# EAGLE board xambi_1.0 (EAGLE 6.5.0)
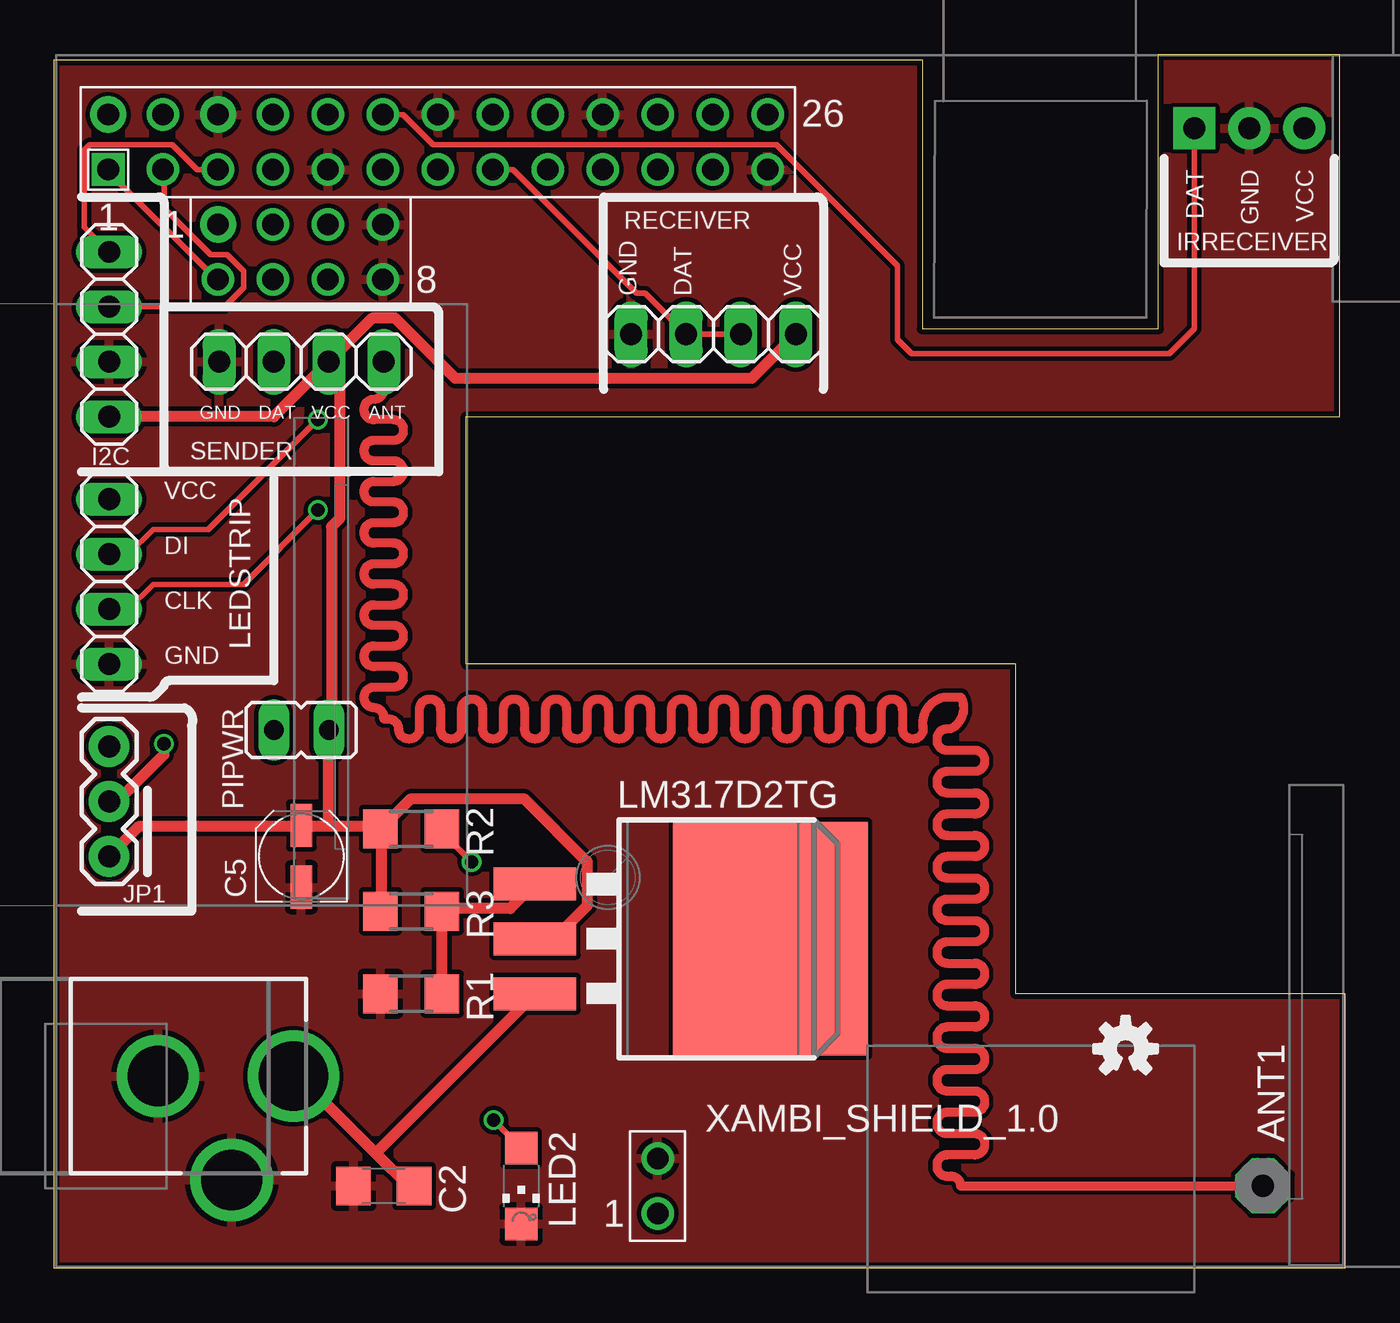
[diagram p0: board, top side]
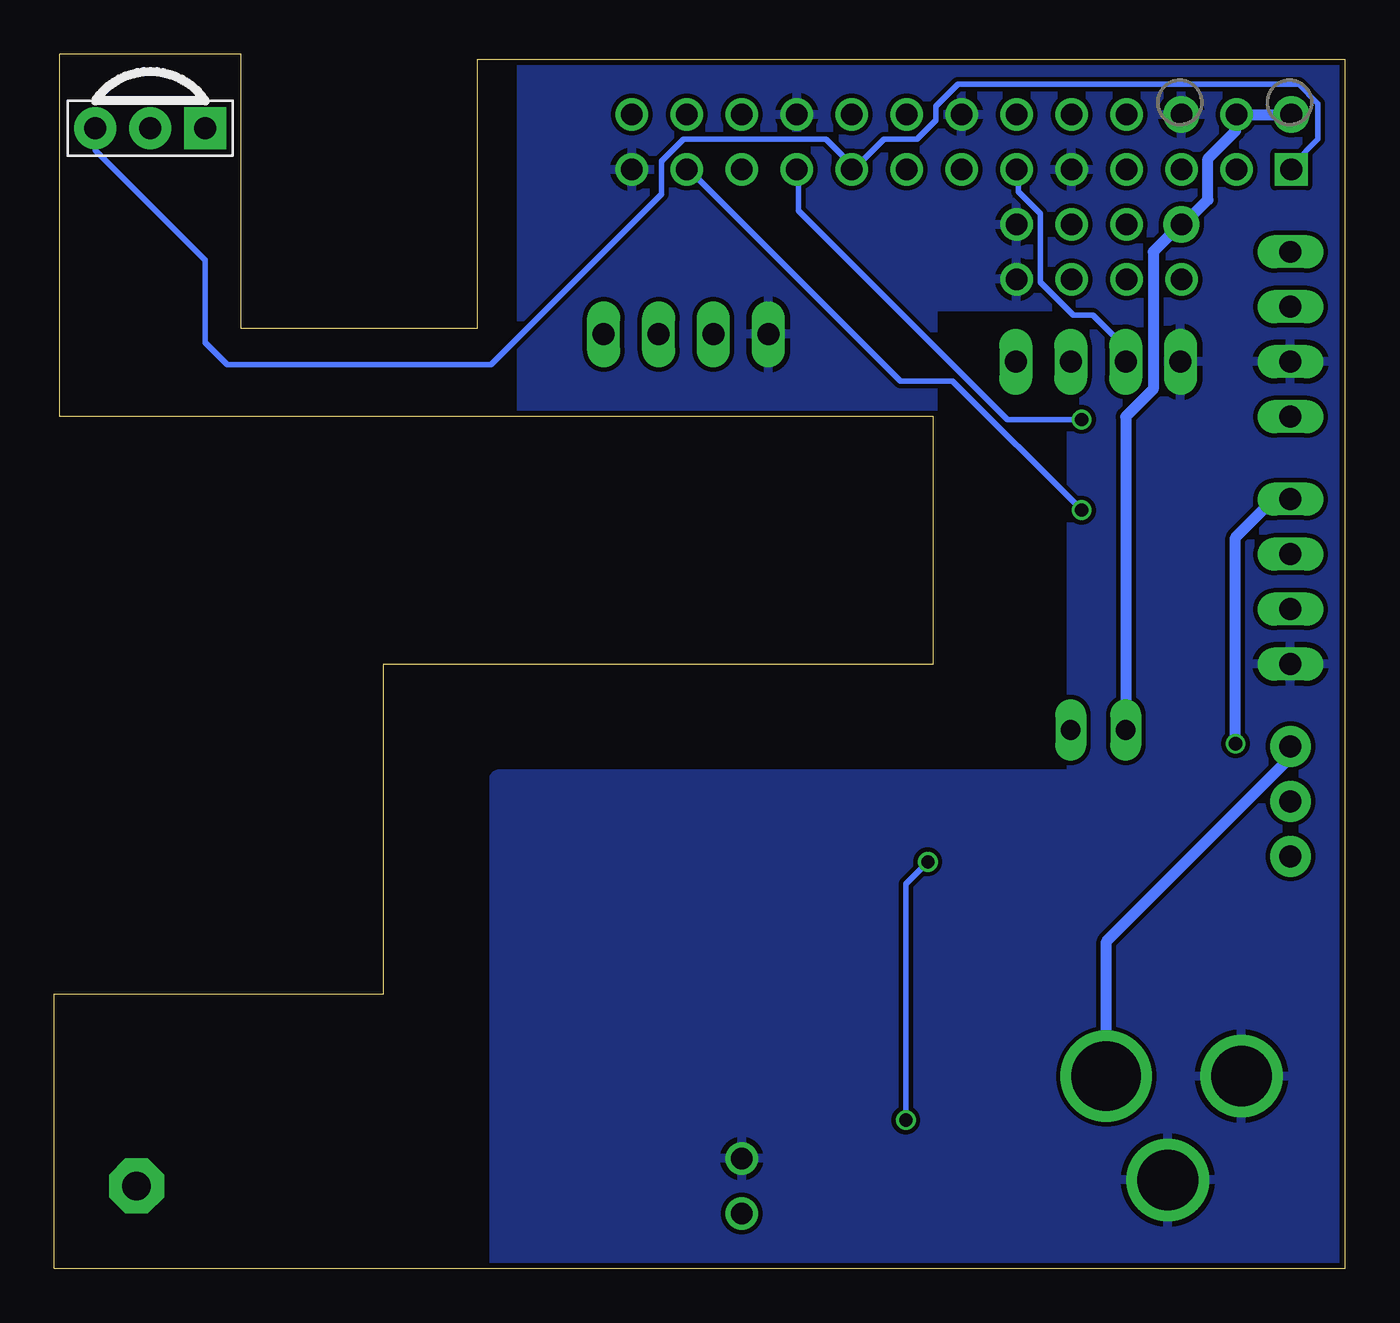
[diagram p1: board, bottom side, seen from below]

Size 59.69 x 56.13 mm. Coordinates in mm from the lower left corner, seen from the top.
Outline: 0,0 0,55.88 40.13,55.88 40.13,43.43 51.05,43.43 51.05,56.13 59.44,56.13 59.44,39.37 19.05,39.37 19.05,27.94 44.45,27.94 44.45,12.7 59.69,12.7 59.69,0 0,0
Copper layers (1*16): Top 0.035mm / dielectric 1.5mm / Bottom 0.035mm
Design rules "ITEADstudio_DRC": minimum track width 6mil, minimum drill 12mil, track to track 6mil, track to pad 6mil, pad to pad 6mil, via to via 6mil, smd to smd 0mil, copper to edge 10mil, drill to drill 10mil, minimum pad ring 10mil, minimum via ring 6mil, stop-mask expansion 2mil, vias tented up to drill 100mil, thermal gap 10mil
Net classes: 0 default: width 0.203 mm, drill 0.254 mm, clearance 0.152 mm; 1 power: width 0.508 mm, drill 0.305 mm, clearance 0.203 mm

## Footprints (pad centres in the part's own frame; a part is rotated, then mirrored left to right if it is on the bottom)
PAD-01 = drill 1.321 pad 2.54 octagon: 1 0,0
C1206 = smd 1.6 x 1.8: 1 -1.4,0; 2 1.4,0
UD-4X5,8_NICHICON = smd 2 x 1: + 1.425,0; - -1.425,0
DCJACK_2MM_PTH = drill 2.8: GND 0,7.35; GNDBREAK 4.8,10.75 | drill 3.2: PWR 0,13.6
1X04 = drill 1.016 long: 1 -3.81,0; 2 -1.27,0; 3 1.27,0; 4 3.81,0
PNA460XM = drill 1.016 pad 1.93 square: 1 -2.54,0 | drill 1.016 pad 1.93: 2 0,0; 3 2.54,0
1X03 = drill 1.016 pad 1.88: 1 0,0; 2 2.54,0; 3 5.08,0
CHIPLED_1206 = smd 1.5 x 1.5: A 0,-1.75; C 0,1.75
TO263 = smd 1.524 x 3.81: 1 -2.54,-8.255; 2 0,-8.255; 3 2.54,-8.255 | smd 10.8 x 9: 4 0,2.635
JP1 = drill 0.914 long: 1 0,-1.27; 2 0,1.27
R1206 = smd 1.6 x 1.803: 1 -1.422,0; 2 1.422,0
RPI-B-V2 = drill 1 square: P1_1 0,0 | drill 1 pad 1.676: P1_2 0,2.54; P1_6 5.08,2.54; P5_1 5.08,-2.54 | drill 1: P1_3 2.54,0; P1_4 2.54,2.54; P1_5 5.08,0; P1_7 7.62,0; P1_8 7.62,2.54; P1_9 10.16,0; P1_10 10.16,2.54; P1_11 12.7,0; P1_12 12.7,2.54; P1_13 15.24,0; P1_14 15.24,2.54; P1_15 17.78,0; P1_16 17.78,2.54; P1_17 20.32,0; P1_18 20.32,2.54; P1_19 22.86,0; P1_20 22.86,2.54; P1_21 25.4,0; P1_22 25.4,2.54; P1_23 27.94,0; P1_24 27.94,2.54; P1_25 30.48,0; P1_26 30.48,2.54; P5_2 5.08,-5.08; P5_3 7.62,-2.54; P5_4 7.62,-5.08; P5_5 10.16,-2.54; P5_6 10.16,-5.08; P5_7 12.7,-2.54; P5_8 12.7,-5.08; P6_1 25.4,-48.26; P6_2 25.4,-45.72

## Placement (x,y rotation side)
ANT1  433MHz  [PAD-01]  55.88,3.81 0 top
C2  100n  [C1206]  15.24,3.81 180 top
C5  1µF  [UD-4X5,8_NICHICON]  11.43,19.05 90 top
CN1  12-32V  [DCJACK_2MM_PTH]  -2.54,8.89 270 top
I2C  [1X04]  2.54,43.18 270 top
IRRECEIVER  PNA460XM  [PNA460XM]  55.24,52.7 180 bottom
JP1  5V [LED] 12V  [1X03]  2.54,19.05 90 top
LED2  red  [CHIPLED_1206]  21.59,3.81 180 top
LEDSTRIP  [1X04]  2.54,31.75 270 top
LM317D2TG  [TO263]  30.48,15.24 270 top
LOGO1  OSHW-LOGOS  [OSHW-LOGO-S]  49.53,10.16 0 top
PIPWR  [JP1]  11.43,24.89 270 top
R1  100R  [R1206]  16.51,12.7 0 top
R2  680  [R1206]  16.51,20.32 180 top
R3  33  [R1206]  16.51,16.51 180 top
RECEIVER  [1X04]  30.48,43.18 0 top
SENDER  [1X04]  11.43,41.91 180 top
U$2  REVISION  [REVISION]  -13.97,-10.16 0 top  (outside the outline)
XAMBI_SHIELD_1.0  XPIX Dev. / 2014  [RPI-B-V2]  2.5,50.8 0 top

## Library data of the parts
ANT1 = discrete
C2 C5 R1-R3 = rcl
CN1 IRRECEIVER LED2 = _adafruit
I2C LEDSTRIP RECEIVER SENDER = pinhead
JP1 = SparkFun-Connectors
LM317D2TG = v-reg
LOGO1 U$2 = SparkFun-Aesthetics
PIPWR = jumper
XAMBI_SHIELD_1.0 = raspberry

## Nets
+3V3: IRRECEIVER.3 XAMBI_SHIELD_1.0.P1_1 XAMBI_SHIELD_1.0.P1_17 XAMBI_SHIELD_1.0.P5_2
+5V [power]: C5.+ I2C.4 JP1.1 LM317D2TG.2 PIPWR.2 R2.2 R3.2 RECEIVER.4 SENDER.2
+12V [power]: C2.1 CN1.PWR JP1.3 LM317D2TG.3
CLK: LEDSTRIP.3 XAMBI_SHIELD_1.0.P1_23
DI: LEDSTRIP.2 XAMBI_SHIELD_1.0.P1_19
GND [power]: C2.2 C5.- CN1.GND CN1.GNDBREAK I2C.3 IRRECEIVER.2 LED2.C LEDSTRIP.4 R1.1 RECEIVER.1 SENDER.4 XAMBI_SHIELD_1.0.P1_6 XAMBI_SHIELD_1.0.P1_9 XAMBI_SHIELD_1.0.P1_14 XAMBI_SHIELD_1.0.P1_20 XAMBI_SHIELD_1.0.P1_25 XAMBI_SHIELD_1.0.P5_7 XAMBI_SHIELD_1.0.P5_8 XAMBI_SHIELD_1.0.P6_2
GPIO30: XAMBI_SHIELD_1.0.P5_5
GPIO31: XAMBI_SHIELD_1.0.P5_6
I2C0_SCL/GPIO29: XAMBI_SHIELD_1.0.P5_4
I2C0_SDA/GPIO28: XAMBI_SHIELD_1.0.P5_3
IRINPUT: IRRECEIVER.1 XAMBI_SHIELD_1.0.P1_12
N$1: I2C.2 XAMBI_SHIELD_1.0.P1_3
N$3 [power]: PIPWR.1 XAMBI_SHIELD_1.0.P1_2 XAMBI_SHIELD_1.0.P1_4 XAMBI_SHIELD_1.0.P5_1
N$4: ANT1.1 SENDER.1
N$5 [power]: JP1.2 LEDSTRIP.1
N$6: I2C.1 XAMBI_SHIELD_1.0.P1_5
N$7: LED2.A R2.1
N$8 [power]: LM317D2TG.1 R1.2 R3.1
RESET: XAMBI_SHIELD_1.0.P6_1
RFINPUT: RECEIVER.2 RECEIVER.3 XAMBI_SHIELD_1.0.P1_15
RFOUTPUT: SENDER.3 XAMBI_SHIELD_1.0.P1_11

## Tracks (layer width: path | path; a pad name or v marks a point on that pad's centre or on a via)
+3V3
  Top 0.254: 22.86,50.8 XAMBI_SHIELD_1.0.P1_17 | 7.62,45.72 XAMBI_SHIELD_1.0.P5_2 7.49,45.72 2.41,50.8 XAMBI_SHIELD_1.0.P1_1 2.54,50.8
  Bottom 0.254: XAMBI_SHIELD_1.0.P1_1 2.41,50.8 2.41,51.05 1.27,52.2 1.27,53.85 2.16,54.74 17.91,54.74 18.92,53.72 18.92,53.09 19.81,52.2 21.34,52.2 22.73,50.8 XAMBI_SHIELD_1.0.P1_17 22.73,50.93 24,52.2 30.61,52.2 31.62,51.18 31.62,49.66 39.5,41.78 51.69,41.78 52.7,42.8 52.7,46.61 57.78,51.69 IRRECEIVER.3
+5V
  Top 0.508: I2C.4 10.16,39.37 SENDER.2 | RECEIVER.4 32.26,41.15 18.54,41.15 15.75,43.94 14.73,43.94 SENDER.2 | R3.2 15.11,16.51 15.11,20.32 R2.2 | 12.7,20.45 11.68,20.45 C5.+ 11.18,20.45 3.94,20.45 JP1.1 | 12.7,20.45 14.86,20.45 R2.2 | 12.7,20.45 PIPWR.2 12.83,25.02 12.83,34.29 13.21,34.67 13.21,42.16 SENDER.2 | LM317D2TG.2 23.11,15.24 24.64,16.76 24.64,18.8 21.72,21.72 16.51,21.72 15.24,20.45 R2.2
+12V
  Top 0.508: 10.79,9.14 11.05,8.89 CN1.PWR 11.3,8.89 14.86,5.33 | C2.1 16.38,3.81 14.86,5.33 | 14.86,5.33 LM317D2TG.3
  Bottom 0.508: JP1.3 2.54,23.62 11.05,15.11 11.05,8.89 CN1.PWR
CLK  (via drill 0.61)
  Top 0.254: v12.19,35.05 8.76,31.62 4.57,31.62 3.43,30.48 LEDSTRIP.3
  Bottom 0.254: v12.19,35.05 18.16,41.02 20.57,41.02 30.35,50.8 XAMBI_SHIELD_1.0.P1_23
DI  (via drill 0.61)
  Top 0.254: v12.19,39.24 7.11,34.16 4.57,34.16 3.43,33.02 LEDSTRIP.2
  Bottom 0.254: v12.19,39.24 15.62,39.24 25.27,48.9 25.27,50.8 XAMBI_SHIELD_1.0.P1_19
GND
  pour Top: 0,0 0,55.88 59.69,55.88 59.69,0
  pour Bottom: 0,0 0,55.88 37.85,55.88 arc-90 38.1,55.63 38.1,39.37 19.3,39.37 arc-90 19.05,39.62 19.05,44.45 12.95,44.45 arc90 12.7,44.2 12.7,22.86 39.12,22.86 arc-90 39.37,22.61 39.37,0
IRINPUT
  Top 0.254: XAMBI_SHIELD_1.0.P1_12 16.13,53.34 17.53,51.94 33.4,51.94 38.99,46.35 38.99,42.93 39.62,42.29 51.56,42.29 52.7,43.43 IRRECEIVER.1
N$1
  Top 0.254: I2C.2 7.87,44.45 8.76,45.34 8.76,46.1 8,46.86 7.24,46.86 5.08,49.02 5.08,50.8 XAMBI_SHIELD_1.0.P1_3
N$3
  Bottom 0.508: PIPWR.1 10.16,39.37 8.89,40.64 8.89,46.99 7.62,48.26 XAMBI_SHIELD_1.0.P5_1 7.37,48.39 6.35,49.4 6.35,51.31 5.08,52.58 5.08,53.34 XAMBI_SHIELD_1.0.P1_4 XAMBI_SHIELD_1.0.P1_2
N$4
  Top 0.406: SENDER.1 15.24,40.64 arc-90 14.78,40.18 arc90 14.33,39.73 14.33,39.69 arc90 14.78,39.23 15.7,39.23 arc-90 16.15,38.77 16.15,38.74 arc-90 15.7,38.28 14.78,38.28 arc90 14.33,37.82 14.33,37.79 arc90 14.78,37.33 15.7,37.33 arc-90 16.15,36.87 16.15,36.84 arc-90 15.7,36.38 14.78,36.38 arc90 14.33,35.92 14.33,35.89 arc90 14.78,35.43 15.7,35.43 arc-90 16.15,34.97 16.15,34.94 arc-90 15.7,34.48 14.78,34.48 arc90 14.33,34.02 14.33,33.99 arc90 14.78,33.53 15.7,33.53 arc-90 16.15,33.07 16.15,33.03 arc-90 15.7,32.58 14.78,32.58 arc90 14.33,32.12 14.33,32.08 arc90 14.78,31.63 15.7,31.63 arc-90 16.15,31.17 16.15,31.13 arc-90 15.7,30.68 14.78,30.68 arc90 14.33,30.22 14.33,30.18 arc90 14.78,29.73 15.7,29.73 arc-90 16.15,29.27 16.15,29.23 arc-90 15.7,28.77 14.78,28.77 arc90 14.33,28.32 14.33,28.28 arc90 14.78,27.82 15.7,27.82 arc-90 16.15,27.37 16.15,27.33 arc-90 15.7,26.87 14.78,26.87 arc90 14.33,26.42 14.33,26.38 arc90 14.78,25.92 arc-90 15.24,25.47 15.24,25.4 15.46,25.4 arc-90 15.92,24.94 arc90 16.38,24.49 16.43,24.49 arc90 16.89,24.94 16.89,25.86 arc-90 17.35,26.31 17.41,26.31 arc-90 17.86,25.86 17.86,24.94 arc90 18.32,24.49 18.38,24.49 arc90 18.83,24.94 18.83,25.86 arc-90 19.29,26.31 19.35,26.31 arc-90 19.8,25.86 19.8,24.94 arc90 20.26,24.49 20.32,24.49 arc90 20.77,24.94 20.77,25.86 arc-90 21.23,26.31 21.29,26.31 arc-90 21.74,25.86 21.74,24.94 arc90 22.2,24.49 22.26,24.49 arc90 22.71,24.94 22.71,25.86 arc-90 23.17,26.31 23.23,26.31 arc-90 23.68,25.86 23.68,24.94 arc90 24.14,24.49 24.2,24.49 arc90 24.66,24.94 24.66,25.86 arc-90 25.11,26.31 25.17,26.31 arc-90 25.63,25.86 25.63,24.94 arc90 26.08,24.49 26.14,24.49 arc90 26.6,24.94 26.6,25.86 arc-90 27.05,26.31 27.11,26.31 arc-90 27.57,25.86 27.57,24.94 arc90 28.02,24.49 28.08,24.49 arc90 28.54,24.94 28.54,25.86 arc-90 28.99,26.31 29.05,26.31 arc-90 29.51,25.86 29.51,24.94 arc90 29.96,24.49 30.02,24.49 arc90 30.48,24.94 30.48,25.86 arc-90 30.93,26.31 30.99,26.31 arc-90 31.45,25.86 31.45,24.94 arc90 31.91,24.49 31.96,24.49 arc90 32.42,24.94 32.42,25.86 arc-90 32.88,26.31 32.93,26.31 arc-90 33.39,25.86 33.39,24.94 arc90 33.85,24.49 33.9,24.49 arc90 34.36,24.94 34.36,25.86 arc-90 34.82,26.31 34.87,26.31 arc-90 35.33,25.86 35.33,24.94 arc90 35.79,24.49 35.84,24.49 arc90 36.3,24.94 36.3,25.86 arc-90 36.76,26.31 36.81,26.31 arc-90 37.27,25.86 37.27,24.94 arc90 37.73,24.49 37.78,24.49 arc90 38.24,24.94 38.24,25.86 arc-90 38.7,26.31 38.76,26.31 arc-90 39.21,25.86 39.21,24.94 arc90 39.67,24.49 39.73,24.49 arc90 40.18,24.94 arc-90 41.15,26.42 41.91,26.42 arc-90 41.45,24.94 41.27,24.94 arc90 40.81,24.49 40.81,24.41 arc90 41.27,23.96 42.55,23.96 arc-90 43.01,23.5 43.01,23.43 arc-90 42.55,22.97 41.27,22.97 arc90 40.81,22.52 40.81,22.45 arc90 41.27,21.99 42.55,21.99 arc-90 43.01,21.53 43.01,21.46 arc-90 42.55,21 41.27,21 arc90 40.81,20.55 40.81,20.48 arc90 41.27,20.02 42.55,20.02 arc-90 43.01,19.56 43.01,19.49 arc-90 42.55,19.04 41.27,19.04 arc90 40.81,18.58 40.81,18.51 arc90 41.27,18.05 42.55,18.05 arc-90 43.01,17.59 43.01,17.52 arc-90 42.55,17.07 41.27,17.07 arc90 40.81,16.61 40.81,16.54 arc90 41.27,16.08 42.55,16.08 arc-90 43.01,15.62 43.01,15.55 arc-90 42.55,15.1 41.27,15.1 arc90 40.81,14.64 40.81,14.57 arc90 41.27,14.11 42.55,14.11 arc-90 43.01,13.66 43.01,13.59 arc-90 42.55,13.13 41.27,13.13 arc90 40.81,12.67 40.81,12.6 arc90 41.27,12.14 42.55,12.14 arc-90 43.01,11.69 43.01,11.62 arc-90 42.55,11.16 41.27,11.16 arc90 40.81,10.7 40.81,10.63 arc90 41.27,10.18 42.55,10.18 arc-90 43.01,9.72 43.01,9.65 arc-90 42.55,9.19 41.27,9.19 arc90 40.81,8.73 40.81,8.66 arc90 41.27,8.21 42.55,8.21 arc-90 43.01,7.75 43.01,7.68 arc-90 42.55,7.22 41.27,7.22 arc90 40.81,6.76 40.81,6.69 arc90 41.27,6.24 42.55,6.24 arc-90 43.01,5.78 43.01,5.71 arc-90 42.55,5.25 41.27,5.25 arc90 40.81,4.79 40.81,4.72 arc90 41.27,4.27 41.45,4.27 arc-90 41.91,3.81 ANT1.1
N$5  (via drill 0.61)
  Top 0.508: v5.08,24.26 5.08,23.75 2.92,21.59 JP1.2
  Bottom 0.508: LEDSTRIP.1 3.3,35.56 5.08,33.78 v5.08,24.26
N$6
  Top 0.254: XAMBI_SHIELD_1.0.P1_5 6.6,50.8 5.46,51.94 1.65,51.94 1.4,51.69 1.4,48.13 I2C.1
N$7  (via drill 0.61)
  Top 0.254: v20.32,6.86 21.59,5.59 LED2.A | v19.3,18.8 18.03,20.07 18.03,20.32 R2.1
  Bottom 0.254: v20.32,6.86 20.32,17.78 v19.3,18.8
N$8
  Top 0.508: R1.2 17.91,12.7 17.91,16.51 R3.1 18.16,16.64 21.08,16.64 LM317D2TG.1
RFINPUT
  Top 0.254: XAMBI_SHIELD_1.0.P1_15 21.21,50.8 26.92,45.09 27.3,45.09 RECEIVER.2 RECEIVER.3
RFOUTPUT
  Bottom 0.254: SENDER.3 10.16,42.55 11.68,44.07 12.57,44.07 14.1,45.59 14.1,48.77 15.11,49.78 15.11,50.8 XAMBI_SHIELD_1.0.P1_11

## Text on the board
tNames: DAT | GND | VCC | GND | DAT | VCC | GND | DAT | VCC | ANT | VCC | DI | CLK | GND